# EAGLE board cft-int-board-smd (EAGLE 5.11)
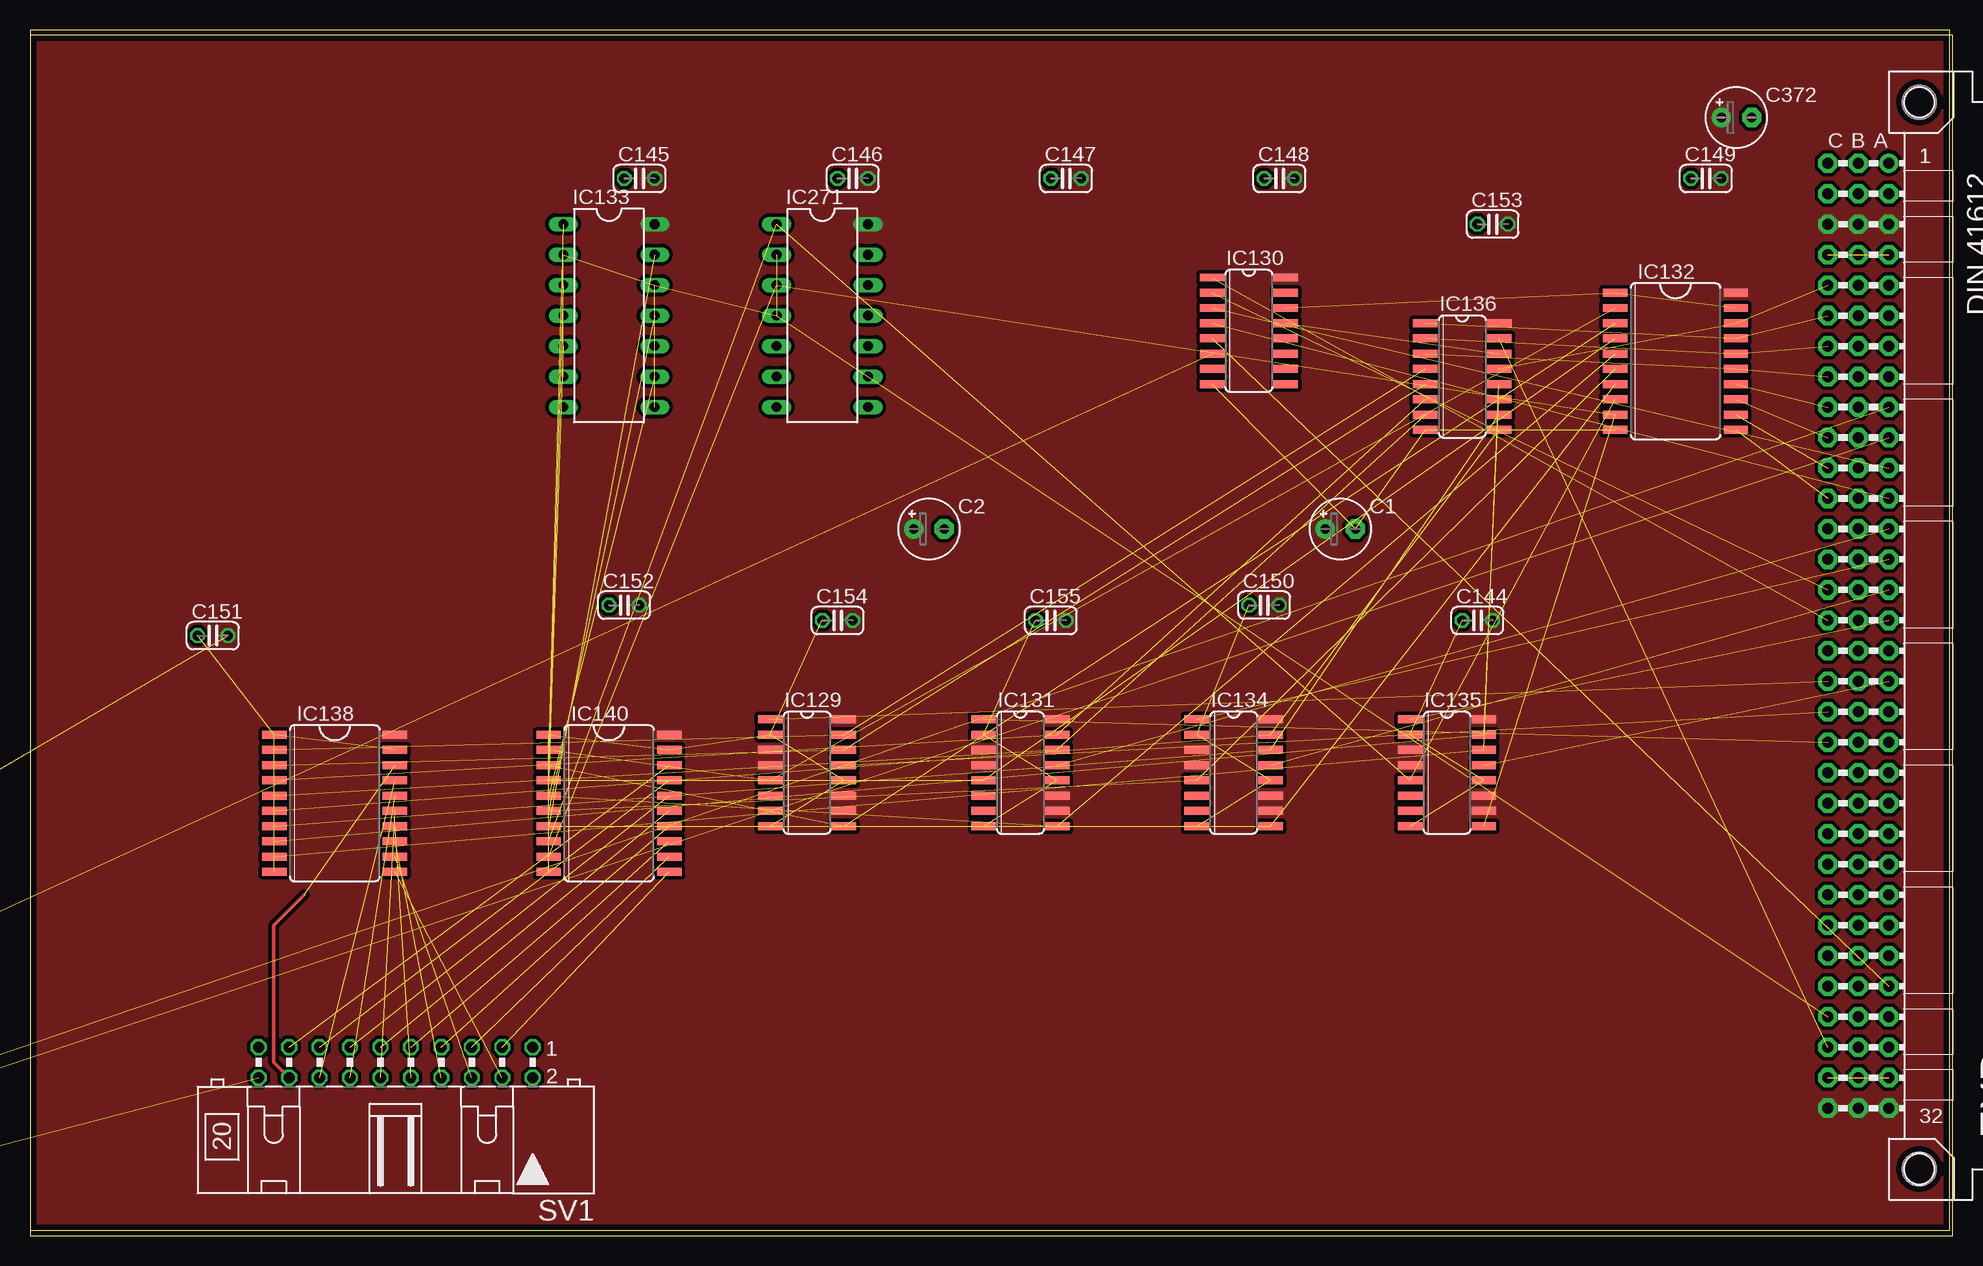
[diagram p0: board, top side]
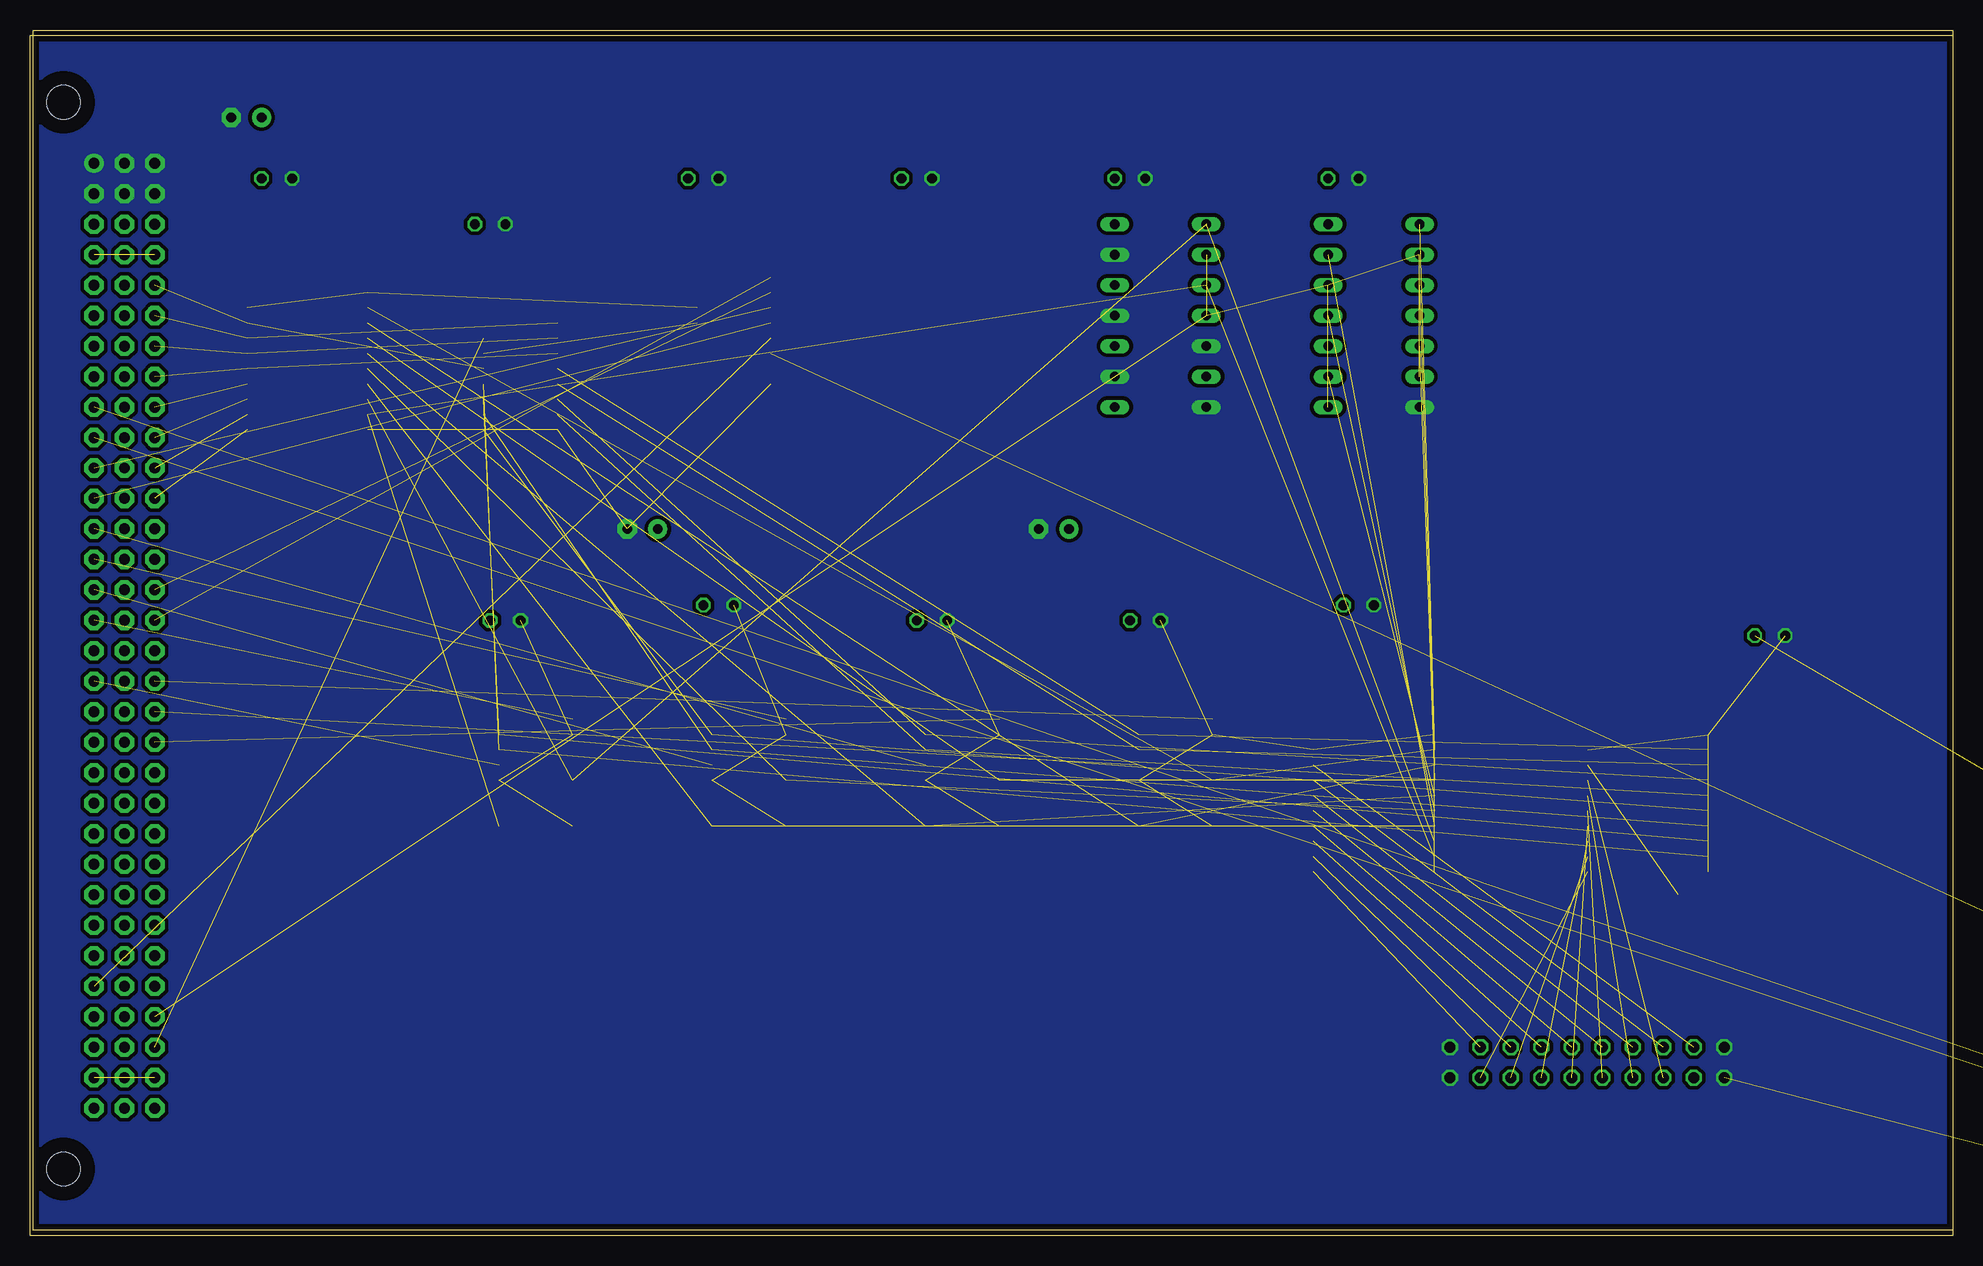
[diagram p1: board, bottom side, seen from below]

Size 160 x 100 mm. Coordinates in mm from the lower left corner, seen from the top.
Outline: 0,0 160,0 160,100 0,100 0,0
Copper layers (1*16): Top 0.035mm / dielectric 0.2mm / Bottom 0.035mm
Design rules "MyroPCB-8mil-prototyping": minimum track width 8mil, minimum drill 12mil, track to track 8mil, track to pad 8mil, pad to pad 8mil, via to via 8mil, smd to smd 8mil, copper to edge 20mil, drill to drill 8mil, minimum pad ring 8mil, minimum via ring 8mil, stop-mask expansion 4mil, vias tented up to drill 0mil, thermal gap 8mil
Net classes: 0 default: width 0.305 mm, clearance 0.203 mm; 1 low power: width 1.27 mm, clearance 0.254 mm; 2 LED power: width 1.93 mm, clearance 0.254 mm

## Footprints (pad centres in the part's own frame; a part is rotated, then mirrored left to right if it is on the bottom)
E2,5-5 = drill 0.813 pad 1.6 round: + -1.27,0 | drill 0.813 pad 1.6 octagon: - 1.27,0
C025-024X044 = drill 0.813 octagon: 1 -1.27,0; 2 1.27,0
VG96K = drill 0.914 pad 1.6 round: A1 154.94,39.37 | drill 0.914 pad 1.6 octagon: A2 154.94,36.83; A3 154.94,34.29; A4 154.94,31.75; A5 154.94,29.21; A6 154.94,26.67; A7 154.94,24.13; A8 154.94,21.59; A9 154.94,19.05; A10 154.94,16.51; A11 154.94,13.97; A12 154.94,11.43; A13 154.94,8.89; A14 154.94,6.35; A15 154.94,3.81; A16 154.94,1.27; A17 154.94,-1.27; A18 154.94,-3.81; A19 154.94,-6.35; A20 154.94,-8.89; A21 154.94,-11.43; A22 154.94,-13.97; A23 154.94,-16.51; A24 154.94,-19.05; A25 154.94,-21.59; A26 154.94,-24.13; A27 154.94,-26.67; A28 154.94,-29.21; A29 154.94,-31.75; A30 154.94,-34.29; A31 154.94,-36.83; A32 154.94,-39.37; B1 152.4,39.37; B2 152.4,36.83; B3 152.4,34.29; B4 152.4,31.75; B5 152.4,29.21; B6 152.4,26.67; B7 152.4,24.13; B8 152.4,21.59; B9 152.4,19.05; B10 152.4,16.51; B11 152.4,13.97; B12 152.4,11.43; B13 152.4,8.89; B14 152.4,6.35; B15 152.4,3.81; B16 152.4,1.27; B17 152.4,-1.27; B18 152.4,-3.81; B19 152.4,-6.35; B20 152.4,-8.89; B21 152.4,-11.43; B22 152.4,-13.97; B23 152.4,-16.51; B24 152.4,-19.05; B25 152.4,-21.59; B26 152.4,-24.13; B27 152.4,-26.67; B28 152.4,-29.21; B29 152.4,-31.75; B30 152.4,-34.29; B31 152.4,-36.83; B32 152.4,-39.37; C1 149.86,39.37; C2 149.86,36.83; C3 149.86,34.29; C4 149.86,31.75; C5 149.86,29.21; C6 149.86,26.67; C7 149.86,24.13; C8 149.86,21.59; C9 149.86,19.05; C10 149.86,16.51; C11 149.86,13.97; C12 149.86,11.43; C13 149.86,8.89; C14 149.86,6.35; C15 149.86,3.81; C16 149.86,1.27; C17 149.86,-1.27; C18 149.86,-3.81; C19 149.86,-6.35; C20 149.86,-8.89; C21 149.86,-11.43; C22 149.86,-13.97; C23 149.86,-16.51; C24 149.86,-19.05; C25 149.86,-21.59; C26 149.86,-24.13; C27 149.86,-26.67; C28 149.86,-29.21; C29 149.86,-31.75; C30 149.86,-34.29; C31 149.86,-36.83; C32 149.86,-39.37 | hole 2.794: 157.48,44.45; 157.48,-44.45
STANDOFF_28_60 = hole 3.302: 0,0
SO16 = smd 0.66 x 2.032: 1 -4.445,-3.073; 2 -3.175,-3.073; 3 -1.905,-3.073; 4 -0.635,-3.073; 5 0.635,-3.073; 6 1.905,-3.073; 7 3.175,-3.073; 8 4.445,-3.073; 9 4.445,3.073; 10 3.175,3.073; 11 1.905,3.073; 12 0.635,3.073; 13 -0.635,3.073; 14 -1.905,3.073; 15 -3.175,3.073; 16 -4.445,3.073
SO20W = smd 0.66 x 2.032: 1 -5.715,-5.029; 2 -4.445,-5.029; 3 -3.175,-5.029; 4 -1.905,-5.029; 5 -0.635,-5.029; 6 0.635,-5.029; 7 1.905,-5.029; 8 3.175,-5.029; 9 4.445,-5.029; 10 5.715,-5.029; 11 5.715,5.029; 12 4.445,5.029; 13 3.175,5.029; 14 1.905,5.029; 15 0.635,5.029; 16 -0.635,5.029; 17 -1.905,5.029; 18 -3.175,5.029; 19 -4.445,5.029; 20 -5.715,5.029
DIL14 = drill 0.813 long: 1 -7.62,-3.81; 2 -5.08,-3.81; 3 -2.54,-3.81; 4 0,-3.81; 5 2.54,-3.81; 6 5.08,-3.81; 7 7.62,-3.81; 8 7.62,3.81; 9 5.08,3.81; 10 2.54,3.81; 11 0,3.81; 12 -2.54,3.81; 13 -5.08,3.81; 14 -7.62,3.81
SOT23-5 = smd 0.69 x 0.99: 1 -0.95,-1.29; 2 0,-1.29; 3 0.95,-1.29; 4 0.95,1.3; 5 -0.95,1.3
ML20L = drill 0.914 octagon: 1 -11.43,-1.27; 2 -11.43,1.27; 3 -8.89,-1.27; 4 -8.89,1.27; 5 -6.35,-1.27; 6 -6.35,1.27; 7 -3.81,-1.27; 8 -3.81,1.27; 9 -1.27,-1.27; 10 -1.27,1.27; 11 1.27,-1.27; 12 1.27,1.27; 13 3.81,-1.27; 14 3.81,1.27; 15 6.35,-1.27; 16 6.35,1.27; 17 8.89,-1.27; 18 8.89,1.27; 19 11.43,-1.27; 20 11.43,1.27

## Placement (x,y rotation side)
C1  1uF  [E2,5-5]  109.22,58.42 0 top
C2  1uF  [E2,5-5]  74.93,58.42 0 top
C144  0.1uF  [C025-024X044]  120.65,50.8 0 top
C145  0.1uF  [C025-024X044]  50.8,87.63 0 top
C146  0.1uF  [C025-024X044]  68.58,87.63 0 top
C147  0.1uF  [C025-024X044]  86.36,87.63 0 top
C148  0.1uF  [C025-024X044]  104.14,87.63 0 top
C149  0.1uF  [C025-024X044]  139.7,87.63 0 top
C150  0.1uF  [C025-024X044]  102.87,52.07 0 top
C151  0.1uF  [C025-024X044]  15.24,49.53 0 top
C152  0.1uF  [C025-024X044]  49.53,52.07 0 top
C153  0.1uF  [C025-024X044]  121.92,83.82 0 top
C154  0.1uF  [C025-024X044]  67.31,50.8 0 top
C155  0.1uF  [C025-024X044]  85.09,50.8 0 top
C372  47uF  [E2,5-5]  142.24,92.71 0 top
EXP  [VG96K]  0,49.53 0 top
H1  HOLE  [STANDOFF_28_60]  -60.96,182.88 0 top  (outside the outline)
H2  HOLE  [STANDOFF_28_60]  -67.31,182.88 0 top  (outside the outline)
H3  HOLE  [STANDOFF_28_60]  -73.66,182.88 0 top  (outside the outline)
H4  HOLE  [STANDOFF_28_60]  -80.01,182.88 0 top  (outside the outline)
IC129  74HC112D  [SO16]  64.77,38.1 270 top
IC130  74HC138D  [SO16]  101.6,74.93 270 top
IC131  74HC112D  [SO16]  82.55,38.1 270 top
IC132  74HC541DW  [SO20W]  137.16,72.39 270 top
IC133  74HC05N  [DIL14]  48.26,76.2 270 top
IC134  74HC112D  [SO16]  100.33,38.1 270 top
IC135  74HC112D  [SO16]  118.11,38.1 270 top
IC136  74HC259D  [SO16]  119.38,71.12 270 top
IC138  74HC541DW  [SO20W]  25.4,35.56 270 top
IC139  74AHC1G08DBV  [SOT23-5]  -88.9,-13.97 0 top  (outside the outline)
IC140  74HC541DW  [SO20W]  48.26,35.56 270 top
IC271  74HC05N  [DIL14]  66.04,76.2 270 top
SV1  [ML20L]  30.48,13.97 180 top

## Library data of the parts
C1 C2 C144-C155 C372 = rcl
EXP = alexios-19inch
H1-H4 IC129-IC136 IC138-IC140 IC271 = alexios
SV1 = con-harting-ml; OC_FARNELL: unknown; OC_NEWARK: unknown

## Nets
!ENDEXT: EXP.B7
!HALT: EXP.A19
!IERW: IC130.13 IC136.14
!IO: EXP.C14
!IODEV1XX: EXP.B24
!IODEV2XX: EXP.B25
!IODEV3XX: EXP.B26
!IRQ: EXP.C29 IC133.2 IC133.4 IC133.6 IC133.8 IC133.10 IC133.12 IC271.2 IC271.4
!IRQ0: EXP.C18 IC129.1
!IRQ1: EXP.C19 IC129.13
!IRQ2: EXP.C20 IC131.1
!IRQ3: EXP.A13 IC131.13
!IRQ4: EXP.A14 IC134.1
!IRQ5: EXP.A15 IC134.13
!IRQ6: EXP.A16 IC135.1
!IRQ7: EXP.A18 IC135.13
!IRQS: EXP.A30
!ISRR: IC130.14 IC132.1 IC132.19
!MEM: EXP.C13
!R: EXP.C15 IC130.2
!RESET: EXP.C30 IC136.15
!SKIPEXT: EXP.B6
!SYSDEV: EXP.A28 IC130.5
!T34: EXP.B27
!W: EXP.C16 IC130.1
!WS: EXP.B8
*TPA: EXP.A17
*TPC: EXP.C17
+3.3V: EXP.A4 EXP.B4 EXP.C4
+12V [LED power]: EXP.A31 EXP.B31 EXP.C31
AB0: EXP.A5
AB1: EXP.A6
AB2: EXP.A7
AB3: EXP.A8
AB4: EXP.A9 IC139.1
AB5: EXP.A10 IC139.2
AB6: EXP.A11 IC130.3
AB7: EXP.A12 IC130.4
AB8: EXP.A20
AB9: EXP.A21
AB10: EXP.A22
AB11: EXP.A23
AB12: EXP.A24
AB13: EXP.A25
AB14: EXP.A26
AB15: EXP.A27
AEXT0: EXP.B13
AEXT1: EXP.B14
AEXT2: EXP.B15
AEXT3: EXP.B16
AEXT4: EXP.B17
AEXT5: EXP.B18
AEXT6: EXP.B19
AEXT7: EXP.B20
CLK1: EXP.A29
CLK2: EXP.B29
CLK3: EXP.B30
CLK4: EXP.B28
DB0: EXP.C5 IC132.18 IC136.13
DB1: EXP.C6 IC132.17 IC136.1
DB2: EXP.C7 IC132.16 IC136.2
DB3: EXP.C8 IC132.15 IC136.3
DB4: EXP.C9 IC132.14
DB5: EXP.C10 IC132.13
DB6: EXP.C11 IC132.12
DB7: EXP.C12 IC132.11
DB8: EXP.C21
DB9: EXP.C22
DB10: EXP.C23
DB11: EXP.C24
DB12: EXP.C25
DB13: EXP.C26
DB14: EXP.C27
DB15: EXP.C28
GND [low power]: C1.- C2.- C144.1 C145.1 C146.1 C147.1 C148.1 C149.1 C150.1 C151.1 C152.1 C153.1 C154.1 C155.1 C372.- EXP.A1 EXP.A2 EXP.B1 EXP.B2 EXP.C1 EXP.C2 IC129.2 IC129.8 IC129.12 IC130.8 IC131.2 IC131.8 IC131.12 IC132.10 IC133.7 IC134.2 IC134.8 IC134.12 IC135.2 IC135.8 IC135.12 IC136.8 IC138.1 IC138.10 IC138.19 IC139.3 IC140.1 IC140.10 IC140.19 IC271.5 IC271.7 IC271.9 IC271.11 IC271.13 SV1.1 SV1.2 SV1.19 SV1.20
IEN0: IC129.15 IC136.4 IC138.2
IEN1: IC129.14 IC136.5 IC138.3
IEN2: IC131.15 IC136.6 IC138.4
IEN3: IC131.14 IC136.7 IC138.5
IEN4: IC134.15 IC136.9 IC138.6
IEN5: IC134.14 IC136.10 IC138.7
IEN6: IC135.15 IC136.11 IC138.8
IEN7: IC135.14 IC136.12 IC138.9
IRF0: IC129.5 IC132.2 IC133.1 IC140.2
IRF1: IC129.9 IC132.3 IC133.3 IC140.3
IRF2: IC131.5 IC132.4 IC133.5 IC140.4
IRF3: IC131.9 IC132.5 IC133.9 IC140.5
IRF4: IC132.6 IC133.11 IC134.5 IC140.6
IRF5: IC132.7 IC133.13 IC134.9 IC140.7
IRF6: IC132.8 IC135.5 IC140.8 IC271.1
IRF7: IC132.9 IC135.9 IC140.9 IC271.3
N$1: IC138.18 SV1.18
N$2: IC138.17 SV1.16
N$3: IC138.16 SV1.14
N$4: IC138.15 SV1.12
N$5: IC138.14 SV1.10
N$6: IC138.13 SV1.8
N$7: IC138.12 SV1.6
N$8: IC138.11 SV1.4
N$9: IC140.18 SV1.17
N$10: IC140.17 SV1.15
N$11: IC140.16 SV1.13
N$12: IC140.15 SV1.11
N$13: IC140.14 SV1.9
N$14: IC140.13 SV1.7
N$15: IC140.12 SV1.5
N$16: IC140.11 SV1.3
N$381: IC130.6 IC139.4
VCC [low power]: C1.+ C2.+ C144.2 C145.2 C146.2 C147.2 C148.2 C149.2 C150.2 C151.2 C152.2 C153.2 C154.2 C155.2 C372.+ EXP.A3 EXP.A32 EXP.B3 EXP.B32 EXP.C3 EXP.C32 IC129.3 IC129.4 IC129.10 IC129.11 IC129.16 IC130.16 IC131.3 IC131.4 IC131.10 IC131.11 IC131.16 IC132.20 IC133.14 IC134.3 IC134.4 IC134.10 IC134.11 IC134.16 IC135.3 IC135.4 IC135.10 IC135.11 IC135.16 IC136.16 IC138.20 IC139.5 IC140.20 IC271.14

## Tracks (layer width: path | path; a pad name or v marks a point on that pad's centre or on a via)
!IERW  (1 unrouted)
!IRQ  (8 unrouted)
!IRQ0  (1 unrouted)
!IRQ1  (1 unrouted)
!IRQ2  (1 unrouted)
!IRQ3  (1 unrouted)
!IRQ4  (1 unrouted)
!IRQ5  (1 unrouted)
!IRQ6  (1 unrouted)
!IRQ7  (1 unrouted)
!ISRR  (2 unrouted)
!R  (1 unrouted)
!RESET  (1 unrouted)
!SYSDEV  (1 unrouted)
!W  (1 unrouted)
+3.3V  (2 unrouted)
+12V  (2 unrouted)
AB4  (1 unrouted)
AB5  (1 unrouted)
AB6  (1 unrouted)
AB7  (1 unrouted)
DB0  (2 unrouted)
DB1  (2 unrouted)
DB2  (2 unrouted)
DB3  (2 unrouted)
DB4  (1 unrouted)
DB5  (1 unrouted)
DB6  (1 unrouted)
DB7  (1 unrouted)
GND  (22 unrouted)
  pour Bottom (isolate 0.305, rank 6, no thermals): 0,100.33 160.02,100.33 160.02,0 0,0
IEN0  (2 unrouted)
IEN1  (2 unrouted)
IEN2  (2 unrouted)
IEN3  (2 unrouted)
IEN4  (2 unrouted)
IEN5  (2 unrouted)
IEN6  (2 unrouted)
IEN7  (2 unrouted)
IRF0  (3 unrouted)
IRF1  (3 unrouted)
IRF2  (3 unrouted)
IRF3  (3 unrouted)
IRF4  (3 unrouted)
IRF5  (3 unrouted)
IRF6  (3 unrouted)
IRF7  (3 unrouted)
N$1  (1 unrouted)
  Top 0.305: SV1.18 20.32,13.97 20.32,25.4 22.86,27.94
N$2  (1 unrouted)
N$3  (1 unrouted)
N$4  (1 unrouted)
N$5  (1 unrouted)
N$6  (1 unrouted)
N$7  (1 unrouted)
N$8  (1 unrouted)
N$9  (1 unrouted)
N$10  (1 unrouted)
N$11  (1 unrouted)
N$12  (1 unrouted)
N$13  (1 unrouted)
N$14  (1 unrouted)
N$15  (1 unrouted)
N$16  (1 unrouted)
N$381  (1 unrouted)
VCC  (1 unrouted)
  pour Top (isolate 0.305, rank 6, no thermals): 0,100.33 160.02,100.33 160.02,0 0,0